# Altium PCB zpc1.PcbDoc
Units mm, origin at the board's own origin, x right, y up, seen from the top; angles counter-clockwise.
Board outline 254 x 130.94 mm, 2 copper layers (Top Layer, Bottom Layer); 39 components, 63 nets, 282 pads, 56 vias.
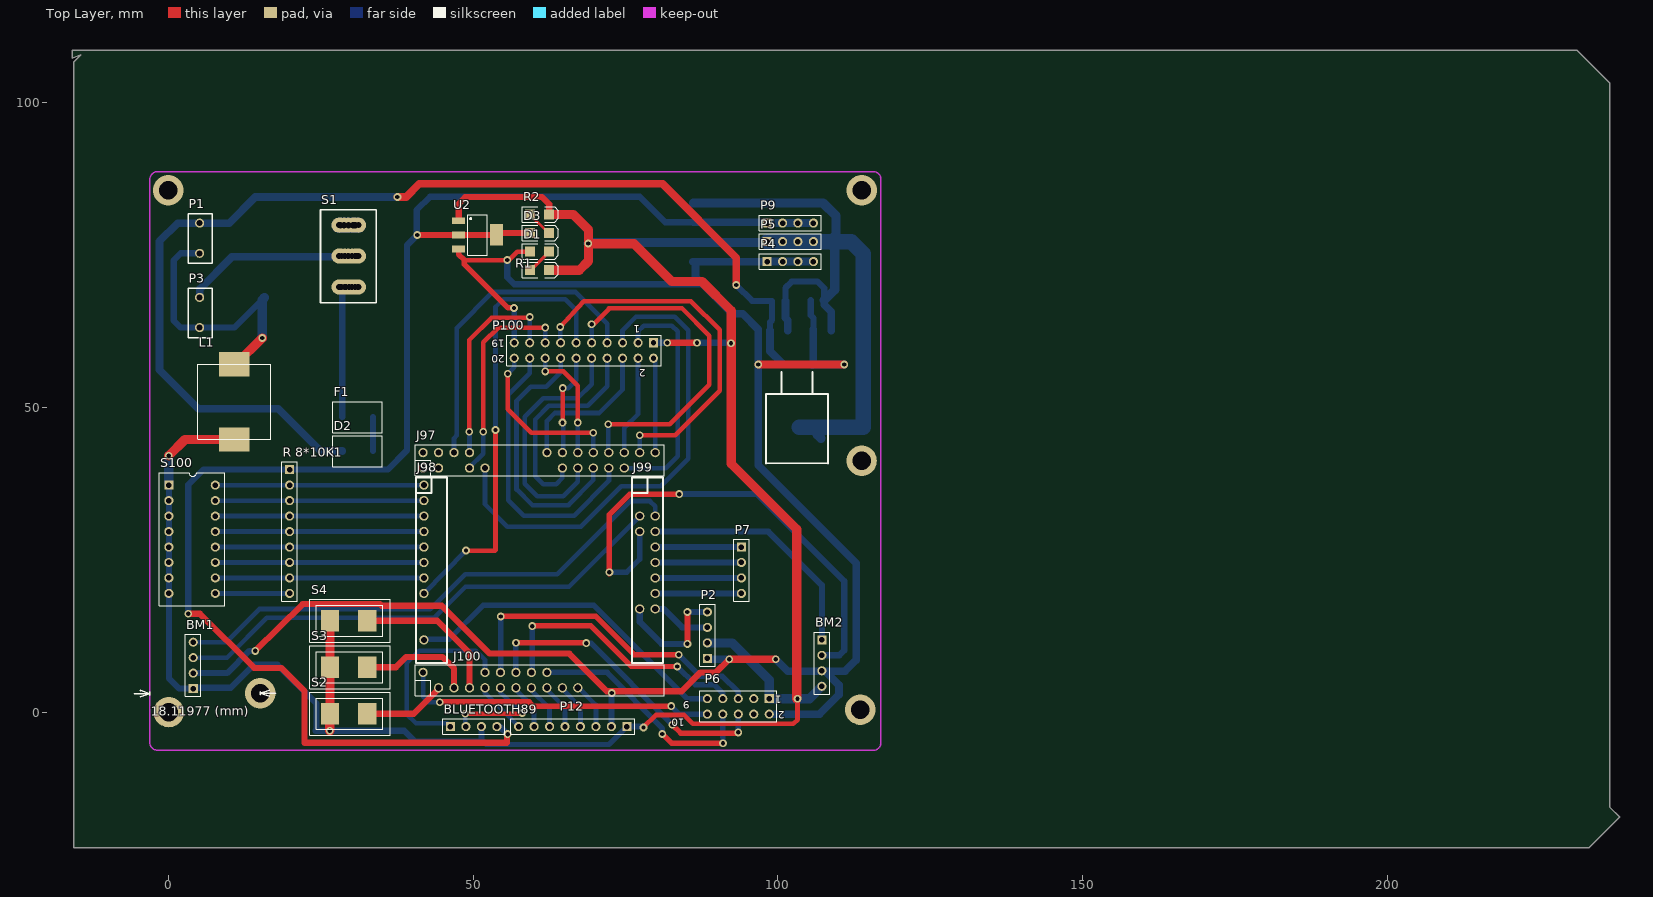
[diagram p0: Top Layer view]
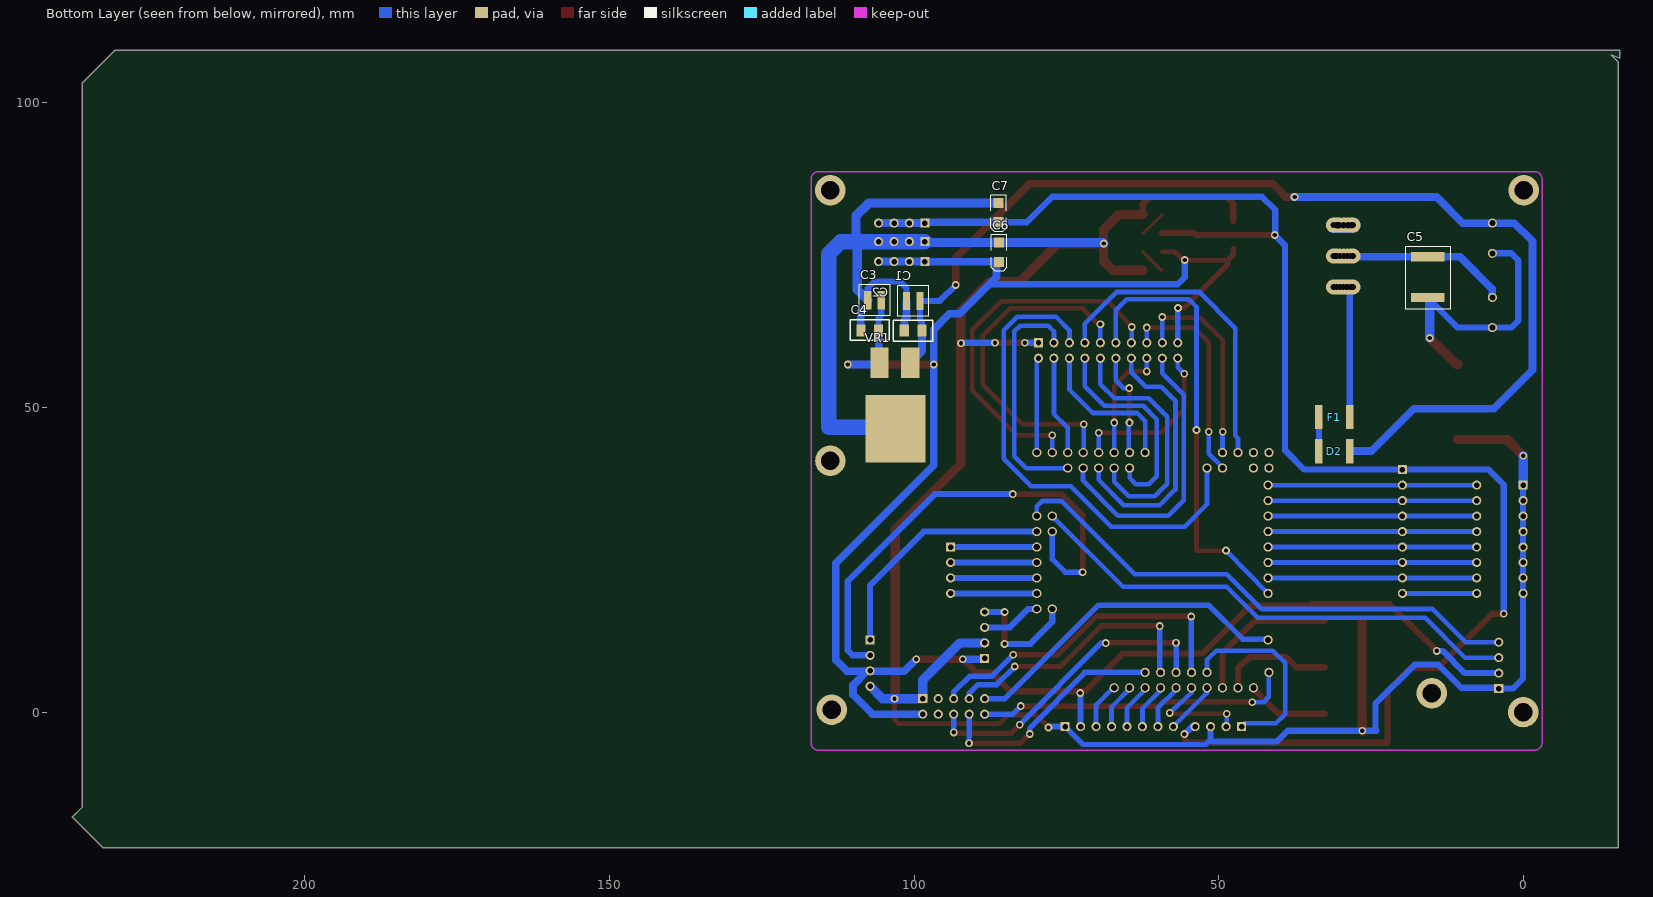
[diagram p1: Bottom Layer view, seen from below]

## Layer stack, top to bottom
Top Layer: signal copper 0.0356
Dielectric: dielectric 0.32, FR-4, Dk 4.8
Bottom Layer: signal copper 0.0356

## Board outline
-14.44,107.874 -15.583,106.731 -15.583,-22.301 233.083,-22.301 238.163,-17.221 236.512,-15.57 236.512,101.397 236.512,103.302 236.258,103.556 231.178,108.636 -15.837,108.636 -15.837,107.366

## Design rules (kind name [scope] priority, off if disabled: settings)
Clearance [All] p1: gap=0.381
ComponentClearance [All] p1: gap=0.254 collisioncheckmode=3 verticalgap=0.254
PolygonConnect [All] p1: connectstyle=Relief reliefconductorwidth=0.254 reliefentries=4 polygonreliefangle="90 Angle"
RoutingVias [All] p1: holewidth=0.711 width=1.27 viastyle="Through Hole" minholewidth=0.711 minwidth=1.27 maxholewidth=0.711 maxwidth=1.27
SolderMaskExpansion [All] p1: expansion=0.102
TestPointUsage [All] p1: valid=0 allowmultiple=FALSE
Testpoint [All] p1: side=15 testpointundercomponent=TRUE minsize=1.016 maxsize=2.54 preferedsize=1.524 minholesize=0 maxholesize=1.016 preferedholesize=0.813 testpointgrid=0.025 style=1023 order=0123456789
Width [All] p1: maxlimit=2.54 minlimit=0.254 preferedwidth=0.254 toplayer_minwidth=0.508 toplayer_prefwidth=0.508 bottomlayer_minwidth=0.508 bottomlayer_prefwidth=0.508 minimp=50.000000 maximp=50.000000 favimp=50.000000
18 further rules are at their usual default settings.

## Components (designator, comment, footprint, x,y, rotation, side; value= is the part's Value field where it differs from the comment)
BLUETOOTH89 "BLUE-TOOH" HDR1X4 46.241,-2.362 r0 top
BM1 "BLUE-TOOH" HDR1X4 4.013,3.861 r90 top
BM2 "BLUE-TOOH" HDR1X4 107.201,11.862 r270 top
C1 "Cap" 22uF钽电容#1 100.089,67.234 r180 bottom
C2 "Cap" 4.7UF钽电容 101.613,62.662 r180 bottom
C3 "Cap" 22uF钽电容#2 106.439,67.869 r180 bottom
C4 "Cap" 4.7UF钽电容 108.725,62.662 r180 bottom
C5 "Cap" 47UF钽电容 15.964,71.603 r90 bottom
C6 "Cap" C0805 86.017,77.089 r270 bottom
C7 "Cap" C0805 86.137,83.582 r270 bottom
D1 "LED0" C0805 59.271,75.59 r0 top
D2 "2A 60V" FUSE 33.541,42.85 r180 top
D3 "LED0" C0805 59.271,78.638 r0 top
F1 "Fuse 1" FUSE 28.461,48.438 r0 top
J97 "CON_16X2_PIN_FIRE" CON-16X2-2.54#1 41.745,40.056 r0 top
J98 "CON_12X2_PIN_FIRE_" CON-12X2-2.54#1 41.872,37.262 r270 top
J99 "CON_12X2_PIN_FIRE_" CON-12X2-2.54#2 77.305,37.262 r270 top
J100 "CON_16X2_PIN_FIRE" CON-16X2-2.54#2 41.745,3.988 r0 top
L1 "Inductor" 100uH 16.777,51.994 r270 top
P1 "Header 2H" 端子 5.067,77.597 r90 top
P2 "Header 4" HDR1X4 88.405,8.814 r90 top
P3 "Header 2H" 端子 5.067,65.405 r90 top
P4 "Header 4" HDR1X4 98.202,73.965 r0 top
P5 "Header 4" HDR1X4 98.202,77.232 r0 top
P6 "Header 5X2" HDR2X5 98.565,2.21 r180 top
P7 "Header 4" HDR1X4 93.993,27.102 r270 top
P9 "Header 4" HDR1X4 98.202,80.28 r0 top
P12 "Header 8" HDR1X8 75.197,-2.362 r180 top
P100 "Header 10X2" HDR2X10 79.566,60.63 r180 top
R1 "Res2" C0805 59.271,72.542 r0 top
R2 "Res2" C0805 59.271,81.686 r0 top
"R 8*10K1" "Header 9" HDR1X9 19.825,39.802 r270 top
S1 "SW-SPDT" Rockey_Switch 29.477,74.854 r270 top
S2 "SW-PB" 白色按键 32.575,-0.508 r180 top
S3 "SW-PB" 白色按键 32.575,7.112 r180 top
S4 "SW-PB" 白色按键 32.575,14.732 r180 top
S100 "SW-DIP8" DIP-16-KEY 0.013,37.262 r270 top
U2 "AMS1117-3.3" SOT223 50.686,78.334 r270 top
VR1 "LM2940S" LM2940 103.137,45.898 r0 bottom

## Footprints (in the part's own frame and the unit in brackets; to place one, negate y for a bottom-side part, rotate by r counter-clockwise, add the part's x,y. Pads: shape width x height; smd on the part's side, far side on the other; paste and mask are expansions set on the pad)
4.7UF钽电容 [mm]
  rect 1.5x2 smd: 1(0,0) 2(2.921,0)
  silkscreen extent -1.78,-1.78 4.7,1.65
22uF钽电容#1 [mm]
  rect 1.2x3 smd: 1(-1.143,0.254) 2(1.067,0.254)
  silkscreen extent -2.54,-2.29 2.54,2.79
22uF钽电容#2 [mm]
  rect 1.2x3 smd: 1(-1.143,-0.254) 2(1.067,-0.254)
  silkscreen extent -2.54,-2.79 2.54,2.29
47UF钽电容 [mm]
  rect 1.5x5.5 smd: 1(-3.556,-0.254) 2(3.144,-0.254)
  silkscreen extent -5.46,-4.06 4.83,3.3
100uH [mm]
  rect 4x5 smd: 1(-5.105,-6.045) 2(7.239,-6.045)
  silkscreen extent -5.11,-12.01 7.24,0
C0805 [mil]
  rect 65x65 smd: 1(0,0) 2(125,0)
  silkscreen extent -50,-50 185,50
CON-12X2-2.54#1 [mm]
  round 1.524 hole 1.016: 1(0,0) 3(2.54,0) 5(5.08,0) 7(7.62,0) 9(10.16,0) 11(12.7,0) 13(15.24,0) 15(17.78,0) 21(25.4,0)
  oval 1.3x1.7 on Top Paste: 2(0,2.54) 4(2.54,2.54) 6(5.08,2.54) 8(7.62,2.54) 10(10.16,2.54) 12(12.7,2.54) 14(15.24,2.54) 16(17.78,2.54) 17(20.32,0) 18(20.32,2.54) 19(22.86,0) 20(22.86,2.54) 22(25.4,2.54) 23(27.94,0) 24(27.94,2.54)
  silkscreen extent -1.27,-1.27 29.21,3.81
CON-12X2-2.54#2 [mm]
  oval 1.3x1.7 on Top Paste: 1(0,0) 2(0,2.54) 3(2.54,0) 4(2.54,2.54) 9(10.16,0) 11(12.7,0) 13(15.24,0) 15(17.78,0) 19(22.86,0) 20(22.86,2.54) 21(25.4,0) 22(25.4,2.54) 23(27.94,0) 24(27.94,2.54)
  round 1.524 hole 1.016: 5(5.08,0) 6(5.08,2.54) 7(7.62,0) 8(7.62,2.54) 10(10.16,2.54) 12(12.7,2.54) 14(15.24,2.54) 16(17.78,2.54) 17(20.32,0) 18(20.32,2.54)
  silkscreen extent -1.27,-1.27 29.21,3.81
CON-16X2-2.54#1 [mil]
  round 60 hole 40: 1(0,0) 2(0,100) 3(100,0) 4(100,100) 6(200,100) 7(300,0) 8(300,100) 9(400,0) 18(800,100) 19(900,0) 20(900,100) 21(1000,0) 22(1000,100) 23(1100,0) 24(1100,100) 25(1200,0) 26(1200,100) 27(1300,0) 28(1300,100) 30(1400,100) 32(1500,100)
  oval 51.18x66.93 on Top Paste: 5(200,0) 11(500,0) 12(500,100) 13(600,0) 14(600,100) 15(700,0) 16(700,100) 17(800,0) 29(1400,0) 31(1500,0)
  round 60 on Top Paste: 10(400,100)
  silkscreen extent -50,-50 1557,150
CON-16X2-2.54#2 [mil]
  oval 51.18x66.93 on Top Paste: 1(0,0) 4(100,100) 6(200,100) 8(300,100) 20(900,100) 22(1000,100) 23(1100,0) 24(1100,100) 25(1200,0) 26(1200,100) 27(1300,0) 28(1300,100) 29(1400,0) 30(1400,100) 31(1500,0) 32(1500,100)
  round 60 hole 40: 2(0,100) 3(100,0) 5(200,0) 7(300,0) 9(400,0) 10(400,100) 11(500,0) 12(500,100) 13(600,0) 14(600,100) 15(700,0) 16(700,100) 17(800,0) 18(800,100) 19(900,0) 21(1000,0)
  silkscreen extent -50,-50 1557,150
DIP-16-KEY [mm] "DIP; 16 Leads; Row Spacing 7.62 mm; Pitch 2.54 mm"
  rect 1.5x1.5 hole 0.9: 1(0,0)
  round 1.5 hole 0.9: 2(2.54,0) 3(5.08,0) 4(7.62,0) 5(10.16,0) 6(12.7,0) 7(15.24,0) 8(17.78,0) 9(17.78,7.62) 10(15.24,7.62) 11(12.7,7.62) 12(10.16,7.62) 13(7.62,7.62) 14(5.08,7.62) 15(2.54,7.62) 16(0,7.62)
  silkscreen extent -2.05,-1.59 19.83,9.2
FUSE [mm]
  rect 1.2x4 smd far side: 1(0,0) 2(5.08,0)
  silkscreen extent -1.52,-2.54 6.6,2.54
HDR1X4 [mm] "Connector; Header; 4 Position"
  rect 1.5x1.5 hole 0.9: 1(0,0)
  round 1.5 hole 0.9: 2(2.54,0) 3(5.08,0) 4(7.62,0)
  silkscreen extent -1.27,-1.27 8.89,1.27
HDR1X8 [mm] "Connector; Header; 8 Position"
  rect 1.5x1.5 hole 0.9: 1(0,0)
  round 1.5 hole 0.9: 2(2.54,0) 3(5.08,0) 4(7.62,0) 5(10.16,0) 6(12.7,0) 7(15.24,0) 8(17.78,0)
  silkscreen extent -1.27,-1.27 19.05,1.27
HDR1X9 [mm] "Connector; Header; 9 Position"
  rect 1.5x1.5 hole 0.9: 1(0,0)
  round 1.5 hole 0.9: 2(2.54,0) 3(5.08,0) 4(7.62,0) 5(10.16,0) 6(12.7,0) 7(15.24,0) 8(17.78,0) 9(20.32,0)
  silkscreen extent -1.27,-1.27 21.59,1.27
HDR2X5 [mm] "Connector; Header; 5x2 Position"
  rect 1.5x1.5 hole 0.9: 1(0,0)
  round 1.5 hole 0.9: 2(0,2.54) 3(2.54,0) 4(2.54,2.54) 5(5.08,0) 6(5.08,2.54) 7(7.62,0) 8(7.62,2.54) 9(10.16,0) 10(10.16,2.54)
  silkscreen extent -1.27,-1.27 11.43,3.81
HDR2X10 [mm] "Connector; Header; 10x2 Position"
  rect 1.5x1.5 hole 0.9: 1(0,0)
  round 1.5 hole 0.9: 2(0,2.54) 3(2.54,0) 4(2.54,2.54) 5(5.08,0) 6(5.08,2.54) 7(7.62,0) 8(7.62,2.54) 9(10.16,0) 10(10.16,2.54) 11(12.7,0) 12(12.7,2.54) 13(15.24,0) 14(15.24,2.54) 15(17.78,0) 16(17.78,2.54) 17(20.32,0) 18(20.32,2.54) 19(22.86,0) 20(22.86,2.54)
  silkscreen extent -1.27,-1.27 24.13,3.81
LM2940 [mm]
  rect 3x5 smd: 1(-2.54,-11.43) 3(2.54,-11.43)
  rect 9.924x11.07 smd: 2(-0.1,-0.635)
Rockey_Switch [mm]
  round 2.5 hole 1: 1(-5.08,-1.524) 1(-5.08,1.651) 2(0,1.651) 2(0,-1.524) 3(5.08,-1.524) 3(5.08,1.651)
  silkscreen extent -7.62,-4.57 7.62,4.57
SOT223 [mm]
  rect 1.1x2.15 smd: 1(-2.3,-3.1) 2(0,-3.1) 3(2.3,-3.1)
  rect 3.5x2.15 smd: 2(0,3.1)
  silkscreen extent -3.35,-1.63 3.35,1.63
白色按键 [mm]
  rect 3x3.5 smd: 1(0,-0.254) 2(6.096,-0.254)
  silkscreen extent -3.81,-3.81 9.4,3.3
端子 [mm]
  round 1.5 hole 1: 1(-2.286,0) 2(2.667,0)
  silkscreen extent -3.94,-2.03 4.19,1.91

## Part data
BLUETOOTH89 BM1 BM2: library part "Header 4", "Header, 4-Pin"
C1 C2 C3 C4 C5 C6 C7: "Capacitor"
D1 D3: "Typical INFRARED GaAs LED"
D2: library part "Diode 1N4934", "1 Amp Fast Recovery Rectifier"
F1: "2A"
J97 J100: "16X2,pin,2.54mm"
J98 J99: "12X2,pin,2.54mm"
P1 P3: "Header, 2-Pin, Right Angle"
P2 P4 P5 P7 P9: "Header, 4-Pin"
P6: "Header, 5-Pin, Dual row"
P12: "Header, 8-Pin"
P100: "Header, 10-Pin, Dual row"
R1 R2: "Resistor"
"R 8*10K1": "Header, 9-Pin"
S1: "SPDT Subminiature Toggle Switch, Right Angle Mounting, Vertical Actuation"
S2 S3 S4: "Switch"
S100: "4009 Series DIP Switch, Raised actuator"
VR1: library part "Volt Reg", "Voltage Regulator"

## Free pads (board coordinates)
  round 5.004 hole 3: 0(15,3.1) 1(0,0) 2(113.513,0.406) 3(113.741,85.649) 4(-0.089,85.649) 6(113.728,41.25)
  round 2.489 hole 1.016: 20(28.321,69.774) 21(28.829,69.774) 22(29.108,69.774) 23(29.591,69.774) 24(30.048,69.774) 25(30.582,69.774) 26(30.988,69.774) 27(28.334,74.854) 28(28.88,74.854) 29(29.464,74.854) 30(30.074,74.854) 31(30.556,74.854) 32(30.886,74.854) 33(28.194,79.934) 34(28.778,79.934) 35(29.489,79.934) 36(30.226,79.934) 37(30.607,79.934)

## Via types
v1: diameter 1.27, hole 0.711, Top Layer to Bottom Layer, 56 vias

## Nets (pads, with @x,y where several pads share a name; then routed paths per layer and width w, separated by ;. In a path a pad name is that pad's centre, name@x,y a point inside that pad or via, vN(x,y) a via of type N, cw(c..) or ccw(c..) an arc to the next point about the centre after c; other vN are vias at no path point)
3.3V: "R 8*10K1.1" BLUETOOTH89.4 C7.2 D3.1 P9.1 P9.2 P9.3 P9.4 U2.2 | length 255.6
  Top Layer w1.016: v1(3.188,16.149) 5.111,16.149 14.008,7.252 18.479,7.252 22.301,3.429 22.301,-5.029 55.461,-5.029 55.537,-4.851 v1@55.537,-3.708 ; v1(40.78,78.308) 53.76,78.308 54.091,78.638 D3.1 ; U2.2@47.56,78.308 U2.2@47.586,78.334
  Bottom Layer w1.016: v1(3.188,16.149) 3.188,37.313 5.677,39.802 35.928,39.802 39.103,42.977 39.103,76.632 40.71,78.238 40.71,82.429 42.888,84.607 77.305,84.607 81.505,80.407 C7.2 ; BLUETOOTH89.4 54.369,-2.362 v1(55.613,-3.607)
  Bottom Layer w1.27: C7.2 98.075,80.407 P9.1 P9.4
5V: BM1.2 BM2.3 C3.2 C4.2 C6.2 D1.1 P2.1 P4.1 P4.2 P4.3 P4.4 P6.2 P12.2 P100.19 U2.3 VR1.3 | length 343
  Top Layer w0.762: 48.527,74.193 55.816,74.193 57.213,75.59 D1.1
  Top Layer w0.889: U2.3 47.586,75.134 48.527,74.193 48.527,73.508 55.689,66.345 v1(56.655,66.345)
  Top Layer w1.016: v1(14.192,10.052) 21.996,17.678 ; 21.996,17.755 34.66,17.755 34.964,17.45 44.818,17.45 52.667,9.601 65.722,9.601 71.895,3.429 84.188,3.429 87.262,6.502 89.802,6.502 v1(91.986,8.687)
  Top Layer w1.27: v1(91.986,8.687) v1(99.632,8.687) ; v1(96.761,57.074) v1(110.858,57.074)
  Bottom Layer w0.889: P100.19 v1@56.706,65.964
  Bottom Layer w1.016: BM1.2 9.576,6.401 13.227,10.052 v1(14.192,10.052) ; v1(55.562,74.219) 55.562,71.374 56.693,70.243 87.656,70.243 ; P12.2 v1@72.657,2.667 ; C3.2 105.372,65.151 105.804,64.719 C4.2
  Bottom Layer w1.27: C6.2 98.151,73.914 P4.1 P4.4 ; C6.2@86.449,73.914 86.449,71.45 92.519,65.38 94.196,65.38 96.761,62.814 96.761,40.513 112.852,24.422 112.852,8.572 110.985,6.706 101.613,6.706 v1(99.632,8.687) ; P2.1@88.328,8.687 v1(91.986,8.687) ; P6.2 106.794,-0.33 109.995,2.87 109.995,4.445 BM2.3@107.658,6.782 ; VR1.3@105.626,56.947 105.804,57.125 C4.2@105.804,62.84 ; VR1.3@105.804,57.252 105.981,57.074 v1(110.858,57.074)
  other v1: 72.733,3.15
7.2V: C5.2 P3.2 pad.27 pad.28 pad.29 pad.30 pad.31 pad.32 S1.2 | length 30.1
  Bottom Layer w1.27: P3.2 5.067,69.444 10.37,74.747 28.226,74.747 pad.27 pad.32@31.509,74.854
AD4: J99.16 P7.4 | length 14.1
  Bottom Layer w1.016: J99.16 P7.4
AD5: J99.14 P7.3 | length 14.1
  Bottom Layer w1.016: J99.14 P7.3
AD6: J99.12 P7.2 | length 14.1
  Bottom Layer w1.016: J99.12 P7.2
AD7: J99.10 P7.1 | length 14.1
  Bottom Layer w1.016: J99.10 P7.1
GND: BLUETOOTH89.3 BM1.1 BM2.4 C1.1 C2.1 C3.1 C4.1 C6.1 C7.1 L1.2 P2.2 P5.1 P5.2 P5.3 P5.4 P6.1 P12.1 P100.1 R1.2 R2.2 S2.2 S3.2 S4.2 S100.1 S100.2 S100.3 S100.4 S100.5 S100.6 S100.7 S100.8 U2.1 VR1.2 | length 510.1
  Top Layer w0.762: v1(77.915,-2.515) 79.947,-0.483 84.595,-0.483 86.042,-1.93 102.502,-1.93 103.213,-1.219 v1(103.213,2.184)
  Top Layer w1.016: U2.1 47.586,83.463 48.654,84.531 61.277,84.531 62.446,83.363 R2.2 ; v1(81.801,60.63) v1@86.271,60.63
  Top Layer w1.524: v1(0,42.1) 2.654,44.755 L1.2 ; v1(26.429,-3.048) S2.2@26.429,-0.584 ; S2.2 S4.2 ; R1.2 67.399,72.542 68.897,74.041 68.897,79.172 66.383,81.686 R2.2 ; v1@68.897,76.886 76.365,76.886 82.563,70.688 87.516,70.688 92.316,65.888 92.316,40.792 103.086,30.023 v1@103.086,2.184
  Bottom Layer w0.889: 51.321,-4.496 52.134,-5.309 72.25,-5.309 P12.1
  Bottom Layer w1.016: S100.1 0.013,5.55 1.702,3.861 BM1.1 4.166,4.013 10.185,4.013 13.97,7.798 17.831,7.798 24.257,1.372 24.257,-3.048 ; 24.066,-3.048 38.646,-3.048 40.424,-4.826 50.99,-4.826 51.346,-4.47 BLUETOOTH89.3@51.346,-2.21 ; P12.1 77.762,-2.362 v1(77.915,-2.515) ; P100.1 v1(81.801,60.63) ; v1(86.703,60.63) 92.215,60.63 v1(92.291,60.554) ; C1.1 101.232,69.621 102.273,70.663 106.489,70.663 107.582,69.571 C3.1
  Bottom Layer w1.27: C1.1 101.232,64.719 101.613,64.338 C2.1 ; C3.1 107.582,66.878 108.725,65.735 C4.1
  Bottom Layer w1.524: S100.1@0,37.274 v1(0,42.1) ; v1(68.847,76.911) 69.025,77.089 98.059,77.089 P5.1 ; C7.1 107.388,83.582 109.512,81.458 109.512,78.308 108.436,77.232 ; P2.2 92.494,11.354 98.565,5.283 P6.1 105.169,2.21 BM2.4 ; VR1.2@106.464,45.517 VR1.2@107.048,44.933 ; VR1.2@107.048,46.457 VR1.2@107.226,46.634 ; C3.1 109.309,69.342 109.309,76.073 108.15,77.232
  Bottom Layer w2.54: P5.1 112.011,77.232 113.983,75.26 113.983,46.761 VR1.2@103.48,46.761
K1: "R 8*10K1.2" J98.1 S100.16 | length 34.2
  Bottom Layer w0.762: S100.16 J98.1
K2: "R 8*10K1.3" J98.3 S100.15 | length 34.2
  Bottom Layer w0.762: S100.15 J98.3
K3: "R 8*10K1.4" J98.5 S100.14 | length 34.3
  Bottom Layer w0.762: S100.14@7.582,32.182 J98.5
K4: "R 8*10K1.5" J98.7 S100.13 | length 34.2
  Bottom Layer w0.762: S100.13 J98.7
K5: "R 8*10K1.6" J98.9 S100.12 | length 34.2
  Bottom Layer w0.762: S100.12 J98.9
K6: "R 8*10K1.7" J98.11 S100.11 | length 34.2
  Bottom Layer w0.762: S100.11 J98.11
K7: "R 8*10K1.8" J98.13 S100.10 | length 34.2
  Bottom Layer w0.762: S100.10 J98.13
K8: "R 8*10K1.9" S100.9 | length 12.2
  Bottom Layer w0.762: S100.9 19.825,19.482
L1: BM1.4 J99.6 | length 87.4
  Bottom Layer w0.762: BM1.4 9.423,11.481 14.859,16.916 42.939,16.916 48.68,22.657 63.742,22.657 75.73,34.646 78.981,34.646 79.845,33.782 J99.6
L2: BM1.3 J99.5 | length 82.9
  Bottom Layer w0.762: BM1.3 9.55,8.941 16.078,15.469 43.595,15.469 48.7,20.574 65.697,20.574 J99.5
NetD1_2: D1.2 R1.1 | length 4.4
  Top Layer w0.508: R1.1 59.398,72.542 D1.2
NetD2_1: D2.1 F1.2 | length 5.6
  Bottom Layer w1.016: D2.1 F1.2
NetD3_2: D3.2 R2.1 | length 4.4
  Top Layer w0.508: R2.1 62.319,78.638 D3.2
NetF1_1: F1.1 pad.20 pad.21 pad.22 pad.23 pad.24 pad.25 pad.26 S1.3 | length 24.7
  Bottom Layer w1.016: F1.1 28.461,69.266 27.953,69.774 pad.26@31.128,69.774
P0: J100.9 P12.8 | length 8.6
  Bottom Layer w0.762: J100.9 51.905,3.15 P12.8
P1: J100.13 P12.7 | length 7.8
  Bottom Layer w0.762: J100.13@57.213,3.988 J100.13 56.985,3.658 59.957,0.686 P12.7
P2: J100.15 P12.6 | length 7.9
  Bottom Layer w0.762: J100.15@59.88,3.988 J100.15 59.525,3.607 62.497,0.635 P12.6
P3: J100.17 P12.5 | length 8
  Bottom Layer w0.762: J100.17@62.039,4.115 J100.17@62.192,4.115 ; J100.17@62.319,3.988 J100.17 62.065,3.708 65.037,0.737 P12.5
P4: J100.19 P12.4 | length 7.8
  Bottom Layer w0.762: J100.19@64.605,3.81 67.577,0.838 P12.4 ; J100.19 J100.19@64.757,3.988
  Bottom Layer w1.016: J100.19@64.605,3.81 J100.19 J100.19@64.706,3.988
P5: J100.21 P12.3 | length 7.7
  Bottom Layer w0.762: J100.21 67.297,3.988 70.117,1.168 P12.3
PB1: J100.3 S2.1 | length 13.6
  Top Layer w1.016: S2.1 40.221,-0.254 44.285,3.81 J100.3
PB2: J100.5 S3.1 | length 18.9
  Top Layer w1.016: S3.1 37.274,7.366 38.976,9.068 44.92,9.068 46.825,7.163 J100.5
PB3: J100.7 S4.1 | length 24.7
  Top Layer w1.016: S4.1 44.056,14.986 49.365,9.677 J100.7
PGND: C5.1 L1.1 P1.1 P3.1 | length 44.5
  Top Layer w1.524: L1.1 11.011,57.099 v1(15.329,61.417)
  Bottom Layer w1.016: P1.1 1.968,75.311 0.8,74.143 0.8,64.262 1.943,63.119 10.782,63.119 ; 10.884,63.221 C5.1@15.329,67.666
  Bottom Layer w1.524: v1(15.329,61.417) 15.329,67.666 C5.1
PH0: J100.12 P6.5 | length 54.4
  Top Layer w0.889: v1@54.496,15.748 70.066,15.748 76.391,9.423 v1(83.706,9.423)
  Bottom Layer w0.889: J100.12 54.496,6.579 v1(54.496,15.697) ; v1(83.706,9.423) 87.211,5.918 90.843,5.918 93.485,3.277 P6.5
PH1: J100.14 P6.6 | length 50.4
  Top Layer w0.889: v1(56.985,11.379) v1@68.491,11.379 ; v1(82.639,-2.057) 84.036,-3.454 v1@93.434,-3.454
  Bottom Layer w0.889: J100.14 v1(56.985,11.379) ; v1(68.516,11.328) 69.329,11.328 v1(82.639,-2.057) ; v1(93.485,-3.327) P6.6
PH2: J100.16 P6.7 | length 44.2
  Top Layer w0.889: v1@59.652,14.148 69.278,14.148 75.933,7.493 v1(83.452,7.493)
  Bottom Layer w0.889: J100.16@59.652,6.655 v1@59.652,14.122 ; v1(83.452,7.493) 86.423,4.521 89.497,4.521 90.945,3.073 P6.7
  other v1: 59.677,14.122
PH3: J100.18 P6.8 | length 39.1
  Top Layer w0.889: v1(81.013,-3.581) 82.537,-5.105 v1(90.97,-5.105)
  Bottom Layer w0.889: J100.18 71.971,6.528 81.022,-2.709 v1(81.013,-3.581) ; P6.8 90.945,-3.454 v1(90.97,-5.105)
PP5: J98.21 P6.9 | length 55.3
  Bottom Layer w0.889: J98.21@41.796,11.963 46.012,11.963 51.625,17.577 69.736,17.577 85.103,2.21 P6.9
PP7: J100.2 P6.10 | length 52
  Top Layer w0.889: v1(44.463,1.626) 44.539,1.702 59.195,1.702 ; 59.22,1.575 59.804,0.991 v1(82.461,0.991)
  Bottom Layer w0.762: J100.2 41.745,2.489 42.608,1.626 v1(44.463,1.626)
  Bottom Layer w0.889: v1@82.588,0.838 83.757,-0.33 P6.10 P6.10@88.405,-0.686
PS0: J99.18 P2.3 | length 9.8
  Bottom Layer w1.016: J99.18 81.242,16.942 84.29,13.894 P2.3
PS1: J99.17 P2.4 | length 20
  Top Layer w1.016: v1(85.128,11.201) v1(85.128,16.434)
  Bottom Layer w1.016: J99.17 77.305,14.808 80.912,11.201 v1(85.128,11.201) ; v1(85.128,16.434) P2.4
PTA25: J97.32 P100.2 | length 15.6
  Bottom Layer w0.762: P100.2 79.845,57.81 J97.32
PTA26: J97.28 P100.4 | length 16.4
  Bottom Layer w0.762: J97.28 74.765,46.66 77.025,48.92 P100.4
PTA27: J97.30 P100.13 | length 61.6
  Top Layer w0.762: v1(64.259,63.211) 68.11,67.437 85.712,67.437 90.411,62.738 90.411,52.73 83.121,45.441 v1(77.305,45.441)
  Bottom Layer w0.762: v1(64.259,63.211) 64.259,60.697 P100.13 ; J97.30 v1(77.305,45.441)
PTA28: J97.27 P100.3 | length 39.2
  Bottom Layer w0.762: J97.27 81.597,40.056 83.528,41.986 83.528,62.509 82.588,63.449 77.991,63.449 77.025,62.484 P100.3
PTA29: J97.26 P100.9 | length 57.4
  Top Layer w0.762: v1(69.406,63.678) 69.736,63.678 72.352,66.294 ; v1(72.149,47.269) 82.258,47.269 88.735,53.746 88.735,61.798 84.239,66.294 72.225,66.294
  Bottom Layer w0.762: P100.9 v1(69.406,63.678) ; J97.26@72.149,42.672 v1(72.149,47.269)
PTB0: J97.24 P100.20 | length 27.7
  Top Layer w0.762: v1(55.639,55.55) 55.639,49.733 59.499,45.872 v1(69.659,45.872)
  Bottom Layer w0.762: v1(55.639,55.55) 56.706,56.617 P100.20 ; J97.24 v1@69.685,45.847
PTB1: J97.25 P100.18 | length 46.9
  Bottom Layer w0.762: P100.18 59.245,55.626 55.74,52.121 55.74,34.773 58.255,32.258 66.535,32.258 72.25,37.973 J97.25@72.25,40.208
PTB2: J97.22 P100.16 | length 19.3
  Top Layer w0.762: v1(61.785,55.931) 64.783,55.931 67.145,53.569 v1@67.145,47.828
  Bottom Layer w0.762: v1@61.785,55.804 P100.16 ; J97.22 v1@67.145,47.498
  other v1: 67.145,47.523
PTB3: J97.23 P100.14 | length 43.4
  Bottom Layer w0.762: P100.14 64.325,55.804 61.938,53.416 59.423,53.416 57.087,51.079 57.087,36.551 59.703,33.934 65.646,33.934 65.646,34.061 69.685,38.1 J97.23
PTB4: J97.20 P100.12 | length 16.7
  Top Layer w0.762: v1@64.681,47.549 v1@64.681,53.111
  Bottom Layer w0.762: v1(64.681,53.188) 65.545,53.188 66.865,54.508 P100.12 ; J97.20@64.732,42.723 v1@64.732,47.523
  other v1: 64.63,47.523
PTB5: J97.21 P100.10 | length 41.2
  Bottom Layer w0.762: J97.21 67.145,37.821 64.732,35.408 60.515,35.408 58.458,37.465 58.458,48.489 61.481,51.511 67.094,51.511 69.406,53.823 P100.10
PTB6: J97.19 P100.8 | length 35
  Bottom Layer w0.762: J97.19 64.605,38.43 63.589,37.414 61.455,37.414 60.16,38.71 60.16,48.031 62.395,50.267 68.745,50.267 71.945,53.467 P100.8
PTB7: J97.18 P100.6 | length 24.9
  Bottom Layer w0.762: J97.18 62.065,47.777 63.386,49.098 70.625,49.098 74.486,52.959 P100.6
PTB20: J97.8 P100.17 | length 34.1
  Top Layer w0.762: v1(49.34,46.025) 49.34,61.087 52.984,64.732 59.131,64.732 v1(59.245,64.846)
  Bottom Layer w0.762: J97.8 v1@49.365,45.999 ; P100.17 v1(59.245,64.846)
PTB21: J97.9 P100.5 | length 81.2
  Bottom Layer w0.762: J97.9 51.905,34.112 55.588,30.429 67.653,30.429 74.282,37.059 80.734,37.059 85.255,41.58 85.255,62.687 83.02,64.922 76.695,64.922 74.486,62.713 P100.5
PTB22: J97.6 P100.7 | length 53.1
  Bottom Layer w0.762: J97.6 46.825,44.958 47.282,45.415 47.282,63.043 53.21,68.971 66.754,68.971 71.945,63.779 P100.7
PTB23: J97.7 P100.15 | length 35.2
  Top Layer w0.762: v1(51.625,46.025) 51.625,60.681 54.064,63.119 v1(61.785,63.119)
  Bottom Layer w0.762: J97.7 J97.7@49.365,40.132 ; J97.7@49.365,40.183 51.625,42.443 v1(51.625,46.025) ; P100.15 v1(61.785,63.119)
PTD0: J98.15 P100.11 | length 74.4
  Top Layer w0.762: v1(48.781,26.518) 53.556,26.518 ; 53.632,26.594 v1(53.632,46.304)
  Bottom Layer w0.762: J98.15 41.923,19.533 v1(48.781,26.518) ; v1(53.632,46.304) 53.632,66.497 54.902,67.767 65.062,67.767 66.865,65.964 P100.11
R1: BM2.1 J99.8 | length 40
  Bottom Layer w1.016: J99.8 98.387,29.642 107.201,20.828 BM2.1
R2: BM2.2 J99.7 | length 81.7
  Top Layer w0.889: v1@72.326,22.708 72.326,32.436 75.679,35.789 v1(83.807,35.789)
  Bottom Layer w0.889: v1(72.326,22.962) 75.171,22.962 77.305,25.095 J99.7@77.305,29.82
  Bottom Layer w1.016: v1@83.655,35.789 96.609,35.789 110.884,21.514 110.884,10.135 110.071,9.322 BM2.2
SCL: BLUETOOTH89.2 J100.11 | length 17.3
  Top Layer w0.762: v1(48.654,-0.279) v1@58.102,-0.279
  Bottom Layer w0.762: BLUETOOTH89.2@48.654,-2.438 v1(48.654,-0.279) ; J100.11 54.445,3.2 v1(58.001,-0.127)
SDA: BLUETOOTH89.1 J100.10 | length 33.2
  Bottom Layer w0.508: J100.10@51.905,6.071 J100.10
  Bottom Layer w0.762: BLUETOOTH89.1 45.707,-1.829 40.576,-1.829 39.078,-0.33 39.078,8.077 41.084,10.084 50.406,10.084 51.905,8.585 J100.10
V1: C1.2 C2.2 D2.2 P1.2 VR1.1 | length 182.9
  Top Layer w1.27: v1(37.529,84.557) 38.976,84.557 41.135,86.716 81.039,86.716 93.154,74.6 v1(93.154,70.104)
  Bottom Layer w1.016: v1(93.154,70.104) 95.771,67.488 C1.2 99.022,64.364 98.692,64.033 C2.2
  Bottom Layer w1.27: D2.2 24.93,42.85 17.97,49.809 4.864,49.809 -1.537,56.21 -1.537,77.267 1.46,80.264 9.919,80.264 14.211,84.557 v1@37.655,84.557 ; C2.2 98.692,59.233 VR1.1
pads on no net: J97.1 J97.2 J97.3 J97.4 J97.5 J97.10 J97.11 J97.12 J97.13 J97.14 J97.15 J97.16 J97.17 J97.29 J97.31 J98.2 J98.4 J98.6 J98.8 J98.10 J98.12 J98.14 J98.16 J98.17 J98.18 J98.19 J98.20 J98.22 J98.23 J98.24 J99.1 J99.2 J99.3 J99.4 J99.9 J99.11 J99.13 J99.15 J99.19 J99.20 J99.21 J99.22 J99.23 J99.24 J100.1 J100.4 J100.6 J100.8 J100.20 J100.22 J100.23 J100.24 J100.25 J100.26 J100.27 J100.28 J100.29 J100.30 J100.31 J100.32 P6.3 P6.4 S1.1
copper on no net: | length 3.2
  Bottom Layer w2.54: 27.953,79.934 31.128,79.934

## Keep-outs
Keep-Out Layer:
  lines w0.254: -3.12,-5.005 -3.12,87.451 ; -3.12,-4.99 ccw(c-1.85,-4.99) -1.85,-6.26 ; -3.105,87.451 cw(c-1.835,87.451) -1.835,88.721 ; -1.85,-6.275 115.575,-6.275 ; -1.846,88.725 115.549,88.725 ; 101.38,-6.275 110.38,-6.275 ; 115.61,-6.275 ccw(c115.61,-5.005) 116.88,-5.005 ; 115.61,88.727 cw(c115.61,87.457) 116.88,87.457 116.88,86.628 116.88,-5.275

## Silkscreen, mask and mechanical layers (free items; w line width, h text height)
Top Overlay:
  lines w0.254: -5.66,3.041 -3.12,3.048 ; -4.645,3.552 -3.12,3.048 ; -4.642,2.536 -3.12,3.048 ; -3.12,3.302 -3.119,2.794 ; 14.999,3.354 15.001,2.846 ; 16.523,3.612 15,3.1 ; 16.525,2.596 15,3.1 ; 17.54,3.107 15,3.1
  text "18.11977 (mm)" at -2.962,-0.608 h1.52 r0.16

## Text inside footprints (layer, text, board x,y; h text height)
P6: Top Overlay "10" at 84.722,-1.118 h1.27 r180; Top Overlay "9" at 85.534,1.778 h1.27 r180; Top Overlay "1" at 100.597,2.718 h1.27 r180; Top Overlay "2" at 101.105,0.178 h1.27 r180
P100: Top Overlay "20" at 55.181,58.598 h1.27 r180; Top Overlay "19" at 55.181,61.138 h1.27 r180; Top Overlay "1" at 77.356,63.525 h1.27 r180; Top Overlay "2" at 78.295,56.312 h1.27 r180